# Altium PCB eFuse_proto1.PcbDoc
Units mm, origin at the board's own origin, x right, y up, seen from the top; angles counter-clockwise.
Board outline 91.4 x 57.4 mm, 2 copper layers (Top Layer, Bottom Layer), stack 1.586 mm thick; 75 components, 50 nets, 198 pads, 83 vias.
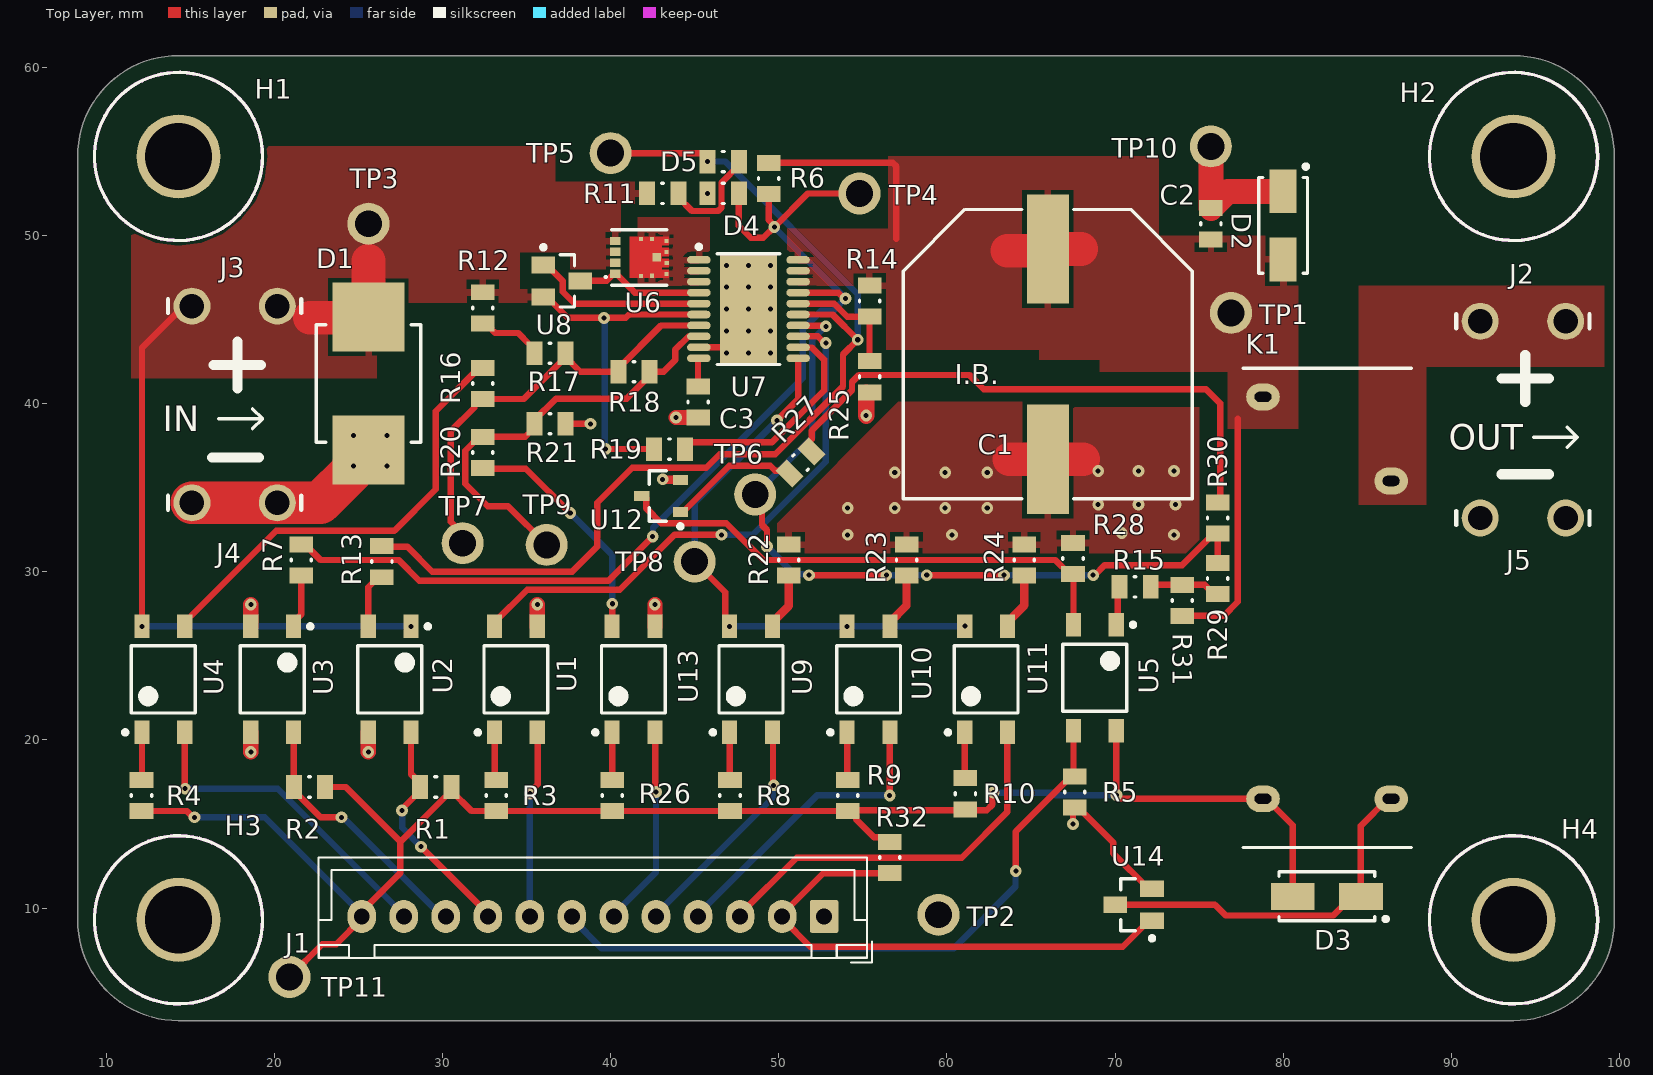
[diagram p0: Top Layer view]
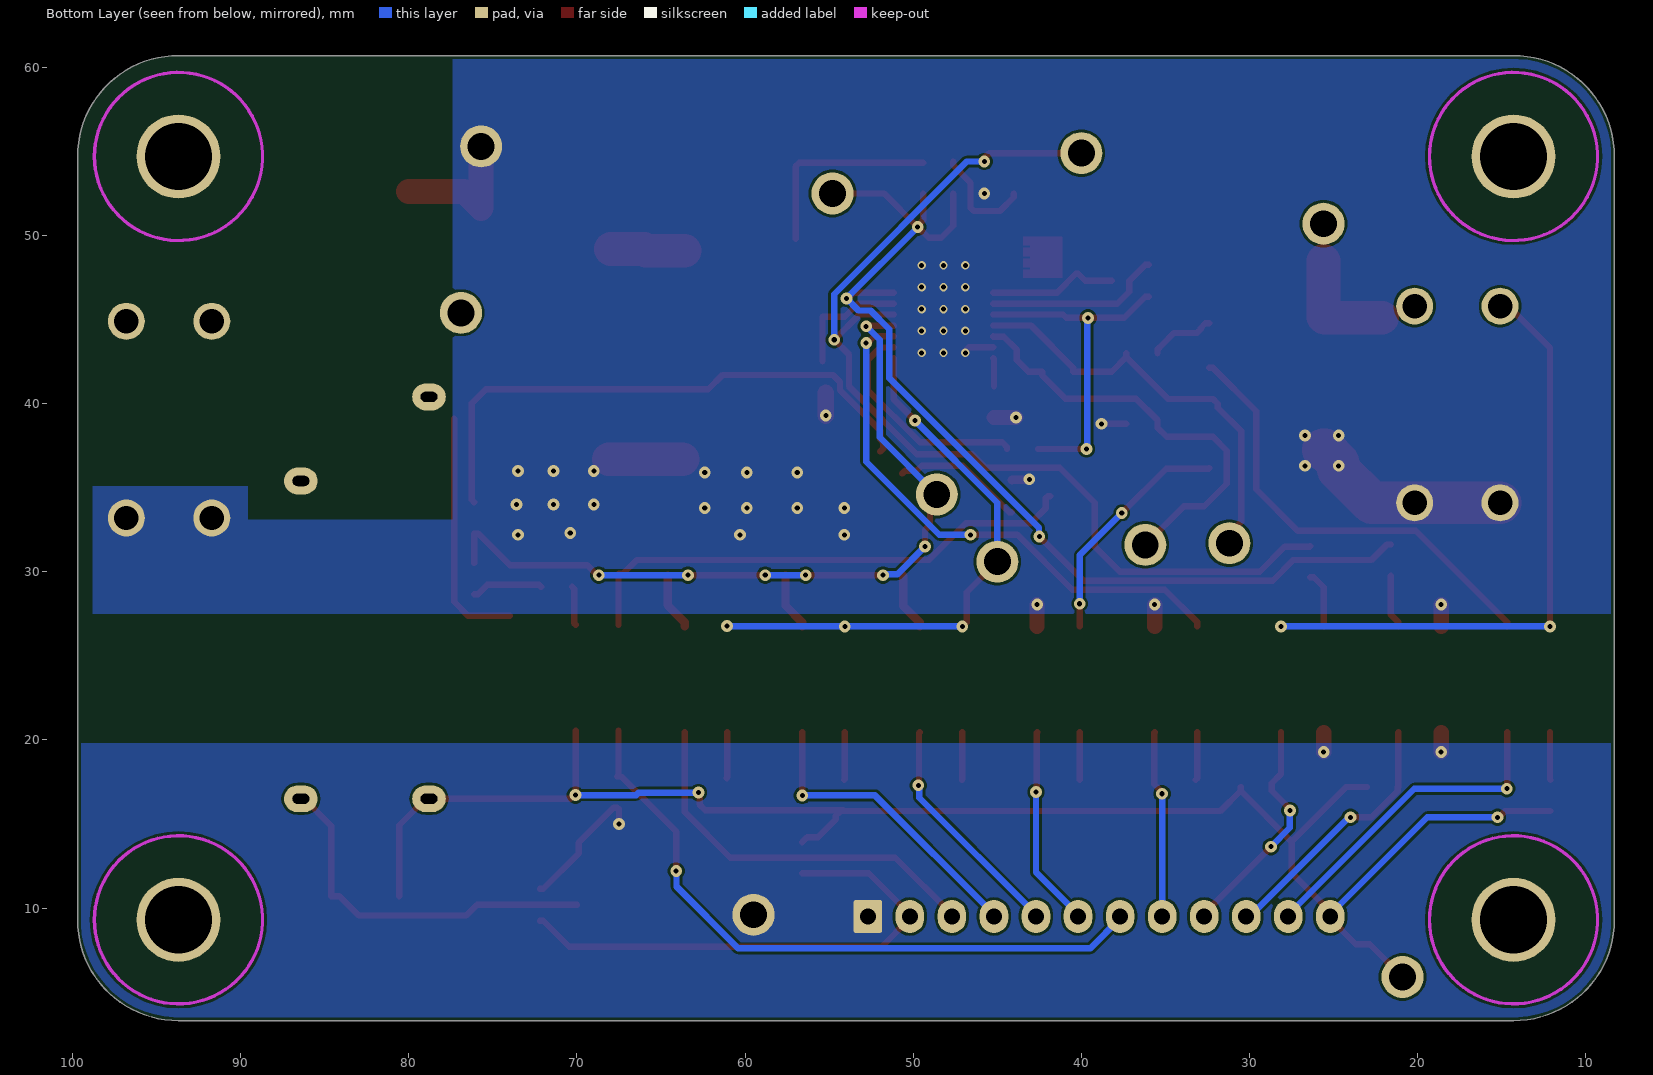
[diagram p1: Bottom Layer view, seen from below]
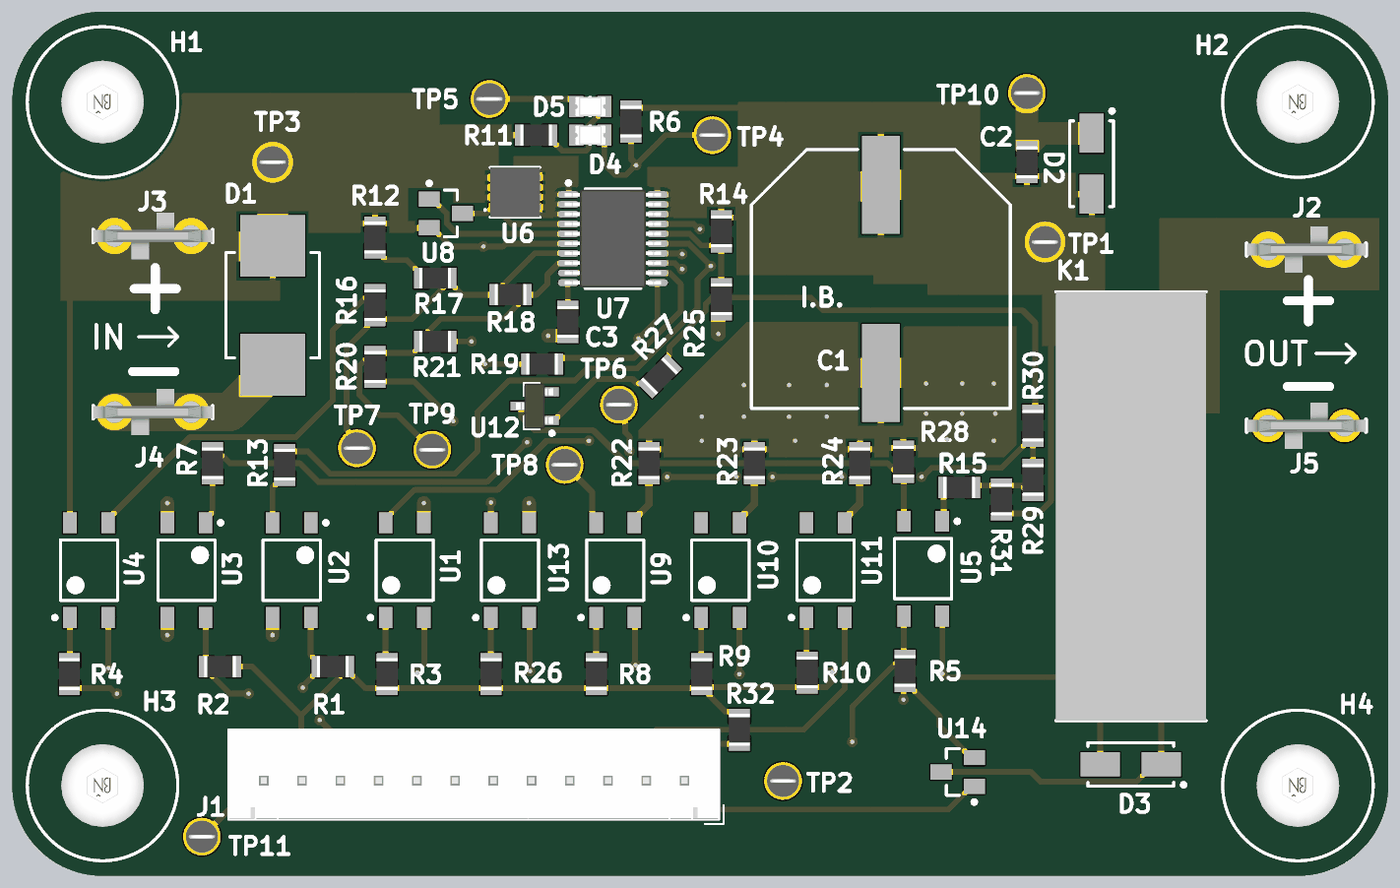
[diagram p2: 3D render of the assembled board from above, using the file's embedded part models]

## Layer stack, top to bottom
Top Solder: solder mask 0.0102, Solder Resist, Dk 3.5
Top Layer: signal copper 0.018
Dielectric 1: dielectric 1.55, FR-4, Dk 4.8
Bottom Layer: signal copper 0.018
Bottom Solder: solder mask 0.0102, Solder Resist, Dk 3.5

## Board outline
8.3,9.3 8.3,54.7 cw(c14.3,54.7) 14.3,60.7 93.7,60.7 cw(c93.7,54.7) 99.7,54.7 99.7,9.3 cw(c93.7,9.3) 93.7,3.3 14.3,3.3 cw(c14.3,9.3)

## Design rules (kind name [scope] priority, off if disabled: settings)
BoardOutlineClearance [All] p1: gap=0.2 ignorepadtopadclearanceinfootprint=FALSE
Clearance [All] p1: gap=0.152 ignorepadtopadclearanceinfootprint=FALSE
DiffPairsRouting [All] p1: maxlimit=1 minlimit=0.152 mostfreqgap=0.254 toplayer_minwidth=0.152 toplayer_maxwidth=1 toplayer_prefwidth=0.381 bottomlayer_minwidth=0.152 bottomlayer_maxwidth=1 bottomlayer_prefwidth=0.381 maxuncoupledlength=12.7
HoleSize [All] p1: absolutevalues=TRUE maxlimit=7 minlimit=0.152 maxpercent=80.000 minpercent=20.000
MatchedLengths [InDifferentialPair('No Differential Pair')] p1: tolerance=0.2 checknetsindiffpair=FALSE checkdiffpairvsdiffpair=TRUE checkxsignals=TRUE checkothers=TRUE usedelayunits=TRUE delaytolerance=0.200000
MinimumSolderMaskSliver [All] p1: minsoldermaskwidth=0.025
PlaneConnect [All] p1: planeconnectstyle=Direct reliefexpansion=0.508 reliefentries=4 reliefconductorwidth=0.254 reliefairgap=0.254
PolygonConnect [All] p1: thpad.connectstyle=Direct thpad.reliefconductorwidth=0.254 thpad.reliefentries=4 thpad.polygonreliefangle="90 Angle" thpad.airgapwidth=0.254 smdpad.connectstyle=Relief smdpad.reliefconductorwidth=0.4 smdpad.reliefentries=4 smdpad.polygonreliefangle="90 Angle" smdpad.airgapwidth=0.254 via.connectstyle=Direct via.reliefconductorwidth=0.254 via.reliefentries=4 via.polygonreliefangle="90 Angle" via.airgapwidth=0.254
RoutingVias [All] p1: holewidth=0.4 width=1 viastyle="Through Hole" minholewidth=0.3 minwidth=0.5 maxholewidth=10 maxwidth=15 useviatemplates=TRUE viatemplateguid#1={22DDA1EE-3D9E-43C3-AB2D-8542CEF153AB} viatemplatename#1=30x70
SilkToSilkClearance [All] p1: silktosilkclearance=0.152
SilkToSolderMaskClearance [IsPad] p1: minsilkscreentomaskgap=0.025 clearancetoexposedcopper=TRUE
SolderMaskExpansion [All] p1: expansion=0.102 istentingtop=FALSE
Width [All] p1: maxlimit=2.54 minlimit=0.152 preferedwidth=0.381 minimp=50.000000 maximp=50.000000 favimp=50.000000
24 further rules are at their usual default settings.

## Classes and differential pairs
component class eFuse: C1 C2 C3 D1 D2 D3 H1 H2 H3 H4 J2 J3 J4 J5 K1 R12 R14 R16 R17 R18 R19 R20 R21 R25 TP1 TP3 TP7 TP8 TP9 TP10 U6 U7 U8
component class Signal: D4 D5 J1 R1 R2 R3 R4 R5 R6 R7 R8 R9 R10 R11 R13 R15 R22 R23 R24 R26 R27 R28 R29 R30 R31 R32 TP2 TP4 TP5 TP6 TP11 U1 U2 U3 U4 U5 U9 U10 U11 U12 U13 U14

## Components (designator, comment, footprint, x,y, rotation, side; value= is the part's Value field where it differs from the comment)
C1 "470uF" CAP_16MM_SMD 66,42.95 r270 top
C2 "1uF" 0805 75.7,50.7 r270 top
C3 "x" 0805 45.2,40.1 r270 top
D1 "SMCJ58CA-HF" "DO-214AB-SMC Bipolar" 25.6,41.2 r90 top
D2 "SS210ATR" "DO-214AC, SMA" 80,50.6 r270 top
D3 "SS210ATR" "DO-214AC, SMA" 82.6,10.7 r180 top
D4 "Green" "0805 LED" 46.7,52.5 r180 top
D5 "Red" "0805 LED" 46.7,54.4 r180 top
H1 "mounting hole" "M3 HOLE iso" 14.3,54.7 r0 top
H2 "mounting hole" "M3 HOLE iso" 93.7,54.7 r0 top
H3 "mounting hole" "M3 HOLE iso" 14.3,9.3 r0 top
H4 "mounting hole" "M3 HOLE iso" 93.7,9.3 r0 top
J1 "xh_12_vert" JST_XH_B12B-XH-A_1x12_P2.50mm_Vertical 52.7,9.5 r180 top
J2 "Blade Quick Disconnect" "TE blade connector" 91.72,44.9 r0 top
J3 "Blade Quick Disconnect" "TE blade connector" 20.18,45.8 r180 top
J4 "Blade Quick Disconnect" "TE blade connector" 20.18,34.1 r180 top
J5 "Blade Quick Disconnect" "TE blade connector" 91.72,33.2 r0 top
K1 "G6RL-1A DC3" "G6RL-1A DC3 relay" 77.61,42.1 r90 top
R1 "10k" 0805 29.6,17.2 r180 top
R2 "10k" 0805 22.1,17.2 r180 top
R3 "390" 0805 33.2,16.7 r270 top
R4 "390" 0805 12.1,16.7 r270 top
R5 "x" 0805 67.6,16.9 r270 top
R6 "2k" 0805 49.4,53.4 r90 top
R7 "4.3k" 0805 21.6,30.7 r270 top
R8 "390" 0805 47.1,16.7 r270 top
R9 "390" 0805 54.1,16.7 r270 top
R10 "390" 0805 61.1,16.8 r270 top
R11 "2k" 0805 43.1,52.5 r180 top
R12 "910K" 0805 32.4,45.7 r90 top
R13 "4.3k" 0805 26.4,30.6 r270 top
R14 "1M" 0805 55.4,46.1 r90 top
R15 ">620" 0805 71.2,29.1 r180 top
R16 "430k" 0805 32.4,41.2 r90 top
R17 "75k" 0805 36.4,43 r180 top
R18 "24k" 0805 41.4,41.9 r180 top
R19 "10k" 0805 43.5,37.3 r0 top
R20 "51k" 0805 32.4,37.1 r90 top
R21 "91k" 0805 36.4,38.8 r180 top
R22 "13K" 0805 50.6,30.7 r270 top
R23 "6.8k" 0805 57.6,30.7 r270 top
R24 "4.3k" 0805 64.6,30.7 r270 top
R25 "56k" 0805 55.4,41.6 r90 top
R26 "390" 0805 40.1,16.7 r270 top
R27 "1K" 0805 51.3,36.5 r45 top
R28 "0" 0805 67.5,30.8 r90 top
R29 "0" 0805 76.1,29.6 r270 top
R30 "0" 0805 76.1,33.2 r270 top
R31 "0" 0805 74,28.3 r270 top
R32 "10k" 0805 56.6,13 r90 top
TP1 "Vout" "Test Loop 1.6mm" 76.9,45.4 r0 top
TP2 "DGND" "Test Loop 1.6mm" 59.5,9.6 r0 top
TP3 "Vin" "Test Loop 1.6mm" 25.6,50.7 r0 top
TP4 "PGOOD" "Test Loop 1.6mm" 54.8,52.5 r0 top
TP5 "FLT" "Test Loop 1.6mm" 40,54.9 r0 top
TP6 "IMON" "Test Loop 1.6mm" 48.6,34.6 r0 top
TP7 "UVLO" "Test Loop 1.6mm" 31.2,31.7 r0 top
TP8 "ILIM" "Test Loop 1.6mm" 45,30.6 r0 top
TP9 "OVP" "Test Loop 1.6mm" 36.2,31.6 r0 top
TP10 "PGND" "Test Loop 1.6mm" 75.7,55.3 r0 top
TP11 "+3.3V" "Test Loop 1.6mm" 20.9,5.9 r0 top
U1 "WL-OCPT" 4-SOP_WE_opto-isolator 34.37,23.6 r90 top
U2 "WL-OCPT" 4-SOP_WE_opto-isolator 26.86,23.6 r270 top
U3 "WL-OCPT" 4-SOP_WE_opto-isolator 19.87,23.6 r270 top
U4 "WL-OCPT" 4-SOP_WE_opto-isolator 13.4,23.6 r90 top
U5 "WL-OCPT" 4-SOP_WE_opto-isolator 68.8,23.7 r270 top
U6 "‎CSD19537Q3‎" "8-VSON (3,3x3,3)" 41.8,48.7 r270 top
U7 "TPS26631PWPT" TSSOP_P065S6.6x6.6 48.2,45.625 r0 top
U8 "BSS138‎" SOT-23-3 37.1,47.3 r0 top
U9 "WL-OCPT" 4-SOP_WE_opto-isolator 48.35,23.6 r90 top
U10 "WL-OCPT" 4-SOP_WE_opto-isolator 55.34,23.6 r90 top
U11 "WL-OCPT" 4-SOP_WE_opto-isolator 62.33,23.6 r90 top
U12 "NPN" SOT23(TO-236AB)P095S230x290 43,34.5 r180 top
U13 "WL-OCPT" 4-SOP_WE_opto-isolator 41.36,23.6 r90 top
U14 "BSS138‎" SOT-23-3 71.1,10.2 r180 top

## Footprints (in the part's own frame and the unit in brackets; to place one, negate y for a bottom-side part, rotate by r counter-clockwise, add the part's x,y. Pads: shape width x height; smd on the part's side, far side on the other; paste and mask are expansions set on the pad)
4-SOP_WE_opto-isolator [mm] "Würth Elektronik Optocoupler Phototransistor foorptint"
  rect 1.4x0.9 smd: 1(-3.15,1.27) 2(-3.15,-1.27) 3(3.15,-1.27) 4(3.15,1.27)
  silkscreen extent -3.27,-1.9 2,2.39, body extent -2.3,-1.9 2.3,1.9, height 2.1
"8-VSON (3,3x3,3)" [mm]
  rect 0.5x0.63 smd paste-10 mask+0.08: 1(0.983,-1.534) 2(-0.976,-1.534) 2(-0.323,-1.534) 2(0.33,-1.534)
  rect 0.25x0.25 smd paste-10 mask+0: 3(-1.1,0) 3(-1.096,0.667) 3(-0.979,1.533) 3(-0.325,1.525) 3(0.329,1.534) 3(0.983,1.526) 3(1.088,0.667) 3(1.1,0)
  rect 0.5x0.5 smd paste-10 mask+0: 3(-0.008,0.952)
  Top Layer region: -1.226,-0.044 -1.226,-0.659 1.224,-0.659 1.224,1.661 0.728,1.661 0.728,1.241 0.573,1.241 0.573,1.661 0.075,1.661 0.075,1.241 -0.078,1.241 -0.078,1.661 -0.574,1.661 -0.574,1.241 -0.729,1.241 -0.729,1.661 -1.226,1.661
  silkscreen extent -1.65,-2.11 1.65,1.55, body extent -1.65,-1.75 1.65,1.55, height 1.1
0805 [mm] "Chip Resistor, 2-Leads, Body 2.00x1.25mm, IPC Medium Density"
  rect 0.95x1.4 smd: 1(-0.925,0) 2(0.925,0)
  silkscreen extent -0.05,-0.6 0.05,0.6, body extent -1.05,-0.7 1.05,0.7, height 0.6
"0805 LED" [mm] "Chip Resistor, 2-Leads, Body 2.00x1.25mm, IPC Medium Density"
  rect 0.95x1.4 smd: 1(-0.925,0) 2(0.925,0)
  silkscreen extent -0.05,-0.6 0.05,0.6, body extent -1,-0.62 1,0.62, height 0.8
CAP_16MM_SMD [mm] "Aluminum Electrolytic Capacitor, Body 17.00x17.00x16.80mm, IPC Low Density"
  rect 6.5x2.5 smd: 1(-6.25,0) 2(6.25,0)
  silkscreen extent -8.6,-8.6 8.6,8.6, body extent -8.6,-8.6 8.6,8.6, height 16.8
"DO-214AB-SMC Bipolar" [mm] "Molded Diode, 2-Leads, Body 6.75x5.90mm, IPC Medium Density"
  rect 4.1x4.3 smd: 1(-3.95,0) 2(3.95,0)
  silkscreen extent -3.5,-3.1 3.5,3.1, body extent -3.5,-3.1 3.5,3.1, height 2.39
"DO-214AC, SMA" [mm] "Molded Diode, 2-Leads, Body 5.23x2.62mm, IPC Medium Density"
  rect 2.6x1.6 smd: 1(-2.025,0) 2(2.025,0)
  silkscreen extent -3.62,-1.45 2.85,1.48, body extent -2.83,-1.42 2.83,1.42, height 2.95
"G6RL-1A DC3 relay" [mm]
  oval 1.6x2 hole 0.6 slot 1 at 90 deg paste-6: 1(-25.6,-1.19) 2(-1.7,-1.19) 3(-6.7,-8.81) 5(-25.6,-8.81)
  silkscreen extent -28.5,-10 0,0, body extent -28.5,-10 0,0, height 12.3
JST_XH_B12B-XH-A_1x12_P2.50mm_Vertical [mm]
  rrect15% 1.7x1.95 hole 0.95: 1(0,0)
  rrect100% 1.7x1.95 hole 0.95: 2(2.5,0) 3(5,0) 4(7.5,0) 5(10,0) 6(12.5,0) 7(15,0) 8(17.5,0) 9(20,0) 10(22.5,0) 11(25,0) 12(27.5,0)
  silkscreen extent -2.85,-3.51 30.06,2.75, body extent -2.59,-3.48 30.02,2.36, height 7.21
"M3 HOLE iso" [mm]
  round 5 hole 4 paste-6: 1(0,0)
  Keep-Out Layer circle w0.2: c0,0 r5
  silkscreen extent -5,-5 5,5, body extent -3.18,-2.75 3.18,2.75, height 1.5
SOT23(TO-236AB)P095S230x290 [mm] "SOT23, 3-Leads, Body 2.90x2.30mm, Pitch 0.95mm, IPC Medium Density"
  rect 0.9x0.6 smd: 1(-1.15,0.95) 2(-1.15,-0.95) 3(1.15,0)
  silkscreen extent -1.28,-1.5 0.7,1.92, body extent -1.25,-1.5 1.25,1.5, height 1.1
SOT-23-3 [mm] "SOT23, 3-Leads, Body 2.92x2.40mm, Pitch 0.95mm, IPC Medium Density"
  rect 1.4x1 smd: 1(-1.1,0.95) 2(-1.1,-0.95) 3(1.1,0)
  silkscreen extent -1.22,-1.55 0.75,2.12, body extent -0.75,-1.56 0.75,1.56, height 1.2
"TE blade connector" [mm] "Quick Disconnect Connectors CONN QC TAB 0.250 SOLDER"
  round 2.2 hole 1.45: 1(0,0) 1(5.08,0)
  silkscreen extent -1.42,-0.42 6.5,0.42, body extent -1.42,-1.54 6.5,1.54, height 10.26
"Test Loop 1.6mm" [mm]
  round 2.5 hole 1.6 paste-6: 1(0,0)
  body extent -1.07,-1.07 1.06,1.07, height 4.57
TSSOP_P065S6.6x6.6 [mm]
  oval 1.4x0.45 smd mask+0.05: 1(-2.95,2.925) 2(-2.95,2.275) 3(-2.95,1.625) 4(-2.95,0.975) 5(-2.95,0.325) 6(-2.95,-0.325) 7(-2.95,-0.975) 8(-2.95,-1.625) 9(-2.95,-2.275) 10(-2.95,-2.925) 11(2.95,-2.925) 12(2.95,-2.275) 13(2.95,-1.625) 14(2.95,-0.975) 15(2.95,-0.325) 16(2.95,0.325) 17(2.95,0.975) 18(2.95,1.625) 19(2.95,2.275) 20(2.95,2.925)
  rect 3.4x6.5 smd paste-6.5 mask-6.5: PAD(0,0)
  silkscreen extent -3.07,-3.3 1.85,3.82, body extent -3.2,-3.25 3.2,3.25, height 1.13

## Part data
C1: library part "cap pol"
C2 C3: library part cap
D1: library part "TVS Diode"
D2 D3: library part "shotkey diode"
D4 D5: library part LED
K1: library part Relay
R1 R2 R3 R4 R5 R6 R7 R8 R9 R10 R11 R12 R13 R14 R15 R16 R17 R18 R19 R20 R21 R22 R23 R24 R25 R26 R27 R28 R29 R30 R31 R32: library part res0805
TP1 TP2 TP3 TP4 TP5 TP6 TP7 TP8 TP9 TP10 TP11: library part "Test point"
U1 U2 U3 U4 U5 U9 U10 U11 U13: library part "optoc WE"
U6 U8 U14: library part "N-mosfet en"

## Via types
v1: diameter 0.7, hole 0.3, Top Layer to Bottom Layer, 68 vias
v2: diameter 0.5, hole 0.3, Top Layer to Bottom Layer, 15 vias

## Nets (pads, with @x,y where several pads share a name; then routed paths per layer and width w, separated by ;. In a path a pad name is that pad's centre, name@x,y a point inside that pad or via, vN(x,y) a via of type N, cw(c..) or ccw(c..) an arc to the next point about the centre after c; other vN are vias at no path point)
+3.3V: D3.2 J1.12 K1.1 R1.1 R2.1 R3.2 R4.2 R8.2 R9.2 R10.2 R26.2 R32.2 TP11.1 U5.4 | length 100.8
  Top Layer w0.381: R4.2 14.793,15.775 15.168,15.4 v1(15.255,15.4) ; TP11.1 22.857,7.857 23.682,7.857 J1.12@25.2,9.375 ; R2.1 24.25,17.2 27.5,13.95 ; J1.12 25.2,9.8 27.5,12.1 27.5,13.95 ; R1.1 R1.1@30.525,16.975 ; R9.2@54.15,15.825 61.1,15.825 62.372,15.825 62.708,16.162 62.708,16.808 v1(62.769,16.869) ; R32.2 56.316,14.209 55.666,14.209 54.61,15.265 54.61,15.49 54.325,15.775 53.875,15.775 R8.2 R26.2 R3.2 31.725,15.775 R1.1@30.525,16.975 ; U5.4 70.082,20.538 70.082,16.734 v1(70.094,16.722) 70.181,16.722 70.402,16.5 K1.1 79,16.5 80.575,14.925 D3.2 ; 27.5,13.95 R1.1@30.525,16.975
  Bottom Layer w0.381: v1(15.255,15.4) 19.425,15.4 25.2,9.625 J1.12 ; v1(62.769,16.869) 66.327,16.869 66.475,16.722 v1(70.094,16.722)
DGND: J1.1 R5.2 TP2.1 U2.3 U3.3 U14.2 | length 10.5
  Top Layer w0.381: U3.3@18.725,20.3 U3.3@18.725,20.45 ; v1(67.5,15) 67.5,15.875 R5.2 67.825,15.975 69.9,13.9 69.9,13.25 72,11.15 U14.2
  Top Layer w0.9: v1(18.6,19.289) U3.3 ; v1(25.59,19.289) U2.3
NetC3_1: C3.1 U7.10 | length 1.7
  Top Layer w0.381: C3.1 45.2,42.668 45.232,42.7 U7.10
NetD3_1: D3.1 K1.5 U14.3 | length 22
  Top Layer w0.381: U14.3 75.942,10.2 76.585,9.557 82.982,9.557 84.125,10.7 D3.1 84.625,14.905 86.22,16.5 K1.5
NetD4_1: D4.1 R6.1 R7.1 TP4.1 U7.17 | length 63.8
  Top Layer w0.381: R7.1 21.825,31.625 22.75,30.7 27.4,30.7 28.626,29.474 39.874,29.474 v1(42.5,32.1) ; D4.1 47.625,50.575 48.342,49.858 49.073,49.858 49.715,50.5 v1(49.734,50.5) ; R6.1 49.4,50.921 49.734,50.586 v1(49.734,50.5) ; U7.17 53.548,46.6 53.888,46.26 v1(53.974,46.26) ; TP4.1 51.734,52.5 v1(49.734,50.5)
  Bottom Layer w0.381: v1(42.5,32.1) 42.521,32.121 42.521,32.621 51.421,41.521 51.421,44.421 52.54,45.54 53.254,45.54 v1(53.974,46.26) v1(49.734,50.5)
NetD5_1: D5.1 R11.1 | length 6.4
  Top Layer w0.381: R11.1 44.025,52.275 44.843,51.457 46.392,51.457 46.593,51.658 46.593,53.143 47.625,54.175 D5.1
NetD5_2: D5.2 R13.1 TP5.1 U7.15 | length 62.5
  Top Layer w0.381: R13.1 26.425,31.5 27.9,31.5 29.393,30.007 37.707,30.007 39.2,31.5 39.2,34.1 41.293,36.193 45.693,36.193 46.5,37 49.8,37 53.824,41.024 53.824,42.924 v1(54.7,43.8) 53.2,45.3 U7.15 ; TP5.1 45.491,54.9 45.775,54.615 v1(45.775,54.4)
  Bottom Layer w0.381: v1(45.775,54.4) 46.814,54.4 54.7,46.514 v1(54.7,43.8)
NetJ1_2: J1.2 R32.1 U14.1 | length 31
  Top Layer w0.381: R32.1 52.65,12.075 50.2,9.625 J1.2 50.2,9.375 51.875,7.7 70.45,7.7 72,9.25 U14.1
NetJ1_3: J1.3 U11.2 | length 23.2
  Top Layer w0.381: J1.3@47.7,9.625 51.075,13 60.88,13 63.6,15.72 63.6,18.653 U11.2
NetJ1_4: J1.4 U10.2 | length 18.1
  Top Layer w0.381: v1(56.6,16.7) 56.605,16.705 56.605,20.445 U10.2
  Bottom Layer w0.381: J1.4@45.2,9.625 52.275,16.7 v1(56.6,16.7)
NetJ1_5: J1.5 U9.2 | length 13.8
  Top Layer w0.381: U9.2 49.66,20.41 49.66,17.34 v1(49.7,17.3)
  Bottom Layer w0.381: J1.5@42.7,9.625 49.639,16.564 49.639,17.239 v1(49.7,17.3)
NetJ1_6: J1.6 U13.2 | length 11.9
  Top Layer w0.381: U13.2 42.665,20.415 42.665,16.935 v1(42.7,16.9)
  Bottom Layer w0.381: J1.6@40.2,9.625 42.7,12.125 v1(42.7,16.9)
NetJ1_7: J1.7 R5.1 U5.3 | length 39.7
  Top Layer w0.381: v1(64.1,12.2) 64.1,14.55 67.375,17.825 R5.1 67.53,17.895 U5.3
  Bottom Layer w0.381: J1.7 37.7,9.375 39.475,7.6 60.4,7.6 64.079,11.278 64.079,12.179 v1(64.1,12.2)
NetJ1_8: J1.8 U1.2 | length 11.2
  Top Layer w0.381: v1(35.2,16.8) 35.2,16.886 35.67,17.356 35.67,20.42 U1.2
  Bottom Layer w0.381: J1.8 v1(35.2,16.8)
NetJ1_9: J1.9 R1.2 U2.4 | length 13.7
  Top Layer w0.381: v1(27.6,15.8) 27.661,15.861 27.661,15.961 28.675,16.975 R1.2 28.675,17.425 28.13,17.97 U2.4 ; v1(28.723,13.651) 32.7,9.674 J1.9
  Bottom Layer w0.381: v1(27.6,15.8) 27.6,14.774 v1(28.723,13.651)
NetJ1_10: J1.10 R2.2 U3.4 | length 15.6
  Top Layer w0.381: U3.4 21.158,20.432 21.158,17.218 R2.2 21.175,16.975 22.75,15.4 v1(24,15.4)
  Bottom Layer w0.381: v1(24,15.4) 24.086,15.4 29.986,9.5 J1.10
NetJ1_11: J1.11 U4.2 | length 19.6
  Top Layer w0.381: U4.2 14.685,20.435 14.685,17.115 v1(14.7,17.1)
  Bottom Layer w0.381: v1(14.7,17.1) 20.2,17.1 27.7,9.6 J1.11
NetJ2_1: J2.1 K1.3
NetR3_1: R3.1 U1.1 | length 2.9
  Top Layer w0.381: U1.1 33.1,17.725 R3.1
NetR4_1: R4.1 U4.1 | length 2.8
  Top Layer w0.381: R4.1 12.13,17.655 U4.1
NetR7_2: R7.2 U3.1 | length 3.2
  Top Layer w0.381: U3.1 21.14,27 21.6,27.46 R7.2
NetR8_1: R8.1 U9.1 | length 2.8
  Top Layer w0.381: U9.1 47.08,17.645 R8.1
NetR9_1: R9.1 U10.1 | length 2.8
  Top Layer w0.381: U10.1 54.07,17.655 R9.1
NetR10_1: R10.1 U11.1 | length 2.7
  Top Layer w0.381: U11.1 61.06,17.765 R10.1
NetR12_1: R12.1 R17.2 | length 4
  Top Layer w0.381: R12.1 32.625,44.775 32.91,44.491 32.91,44.423 33.133,44.2 34.5,44.2 35.191,43.51 35.475,43.225 R17.2
NetR13_2: R13.2 U2.2 | length 3.4
  Top Layer w0.381: U2.2 25.59,29.09 26.175,29.675 R13.2
NetR14_1: R14.1 R25.2 U7.16 | length 7.2
  Top Layer w0.381: U7.16 53.304,45.95 54.079,45.175 R14.1 R25.2
NetR15_1: R15.1 R29.2 R31.1 | length 4.3
  Top Layer w0.381: R15.1 72.25,29.225 R31.1 75.325,29.225 75.875,28.675 R29.2
NetR15_2: R15.2 U5.1 | length 2.3
  Top Layer w0.381: U5.1 70.172,26.953 70.172,28.997 R15.2
NetR16_1: R16.1 R17.1 R18.2 TP7.1 U7.7 | length 25.5
  Top Layer w0.381: TP7.1 31.2,32.273 30.5,32.973 30.5,38.375 31.891,39.766 31.891,39.991 32.175,40.275 R16.1 34.825,40.275 R17.1@37.325,42.775 ; R17.1 R17.1@37.325,42.775 ; U7.7 43,44.65 40.475,42.125 R18.2 38.2,41.9 R17.1@37.325,42.775
NetR16_2: R16.2 U4.3 | length 27
  Top Layer w0.381: U4.3 14.67,27 20.113,32.443 27.143,32.443 29.6,34.9 29.6,39.55 32.175,42.125 R16.2
NetR18_1: R18.1 R20.2 R21.2 TP9.1 U7.8 | length 25.8
  Top Layer w0.381: TP9.1 33.9,33.9 32.7,33.9 31.357,35.243 31.357,37.207 32.175,38.025 R20.2 34.925,38.025 35.475,38.575 R21.2 35.475,39.025 36.75,40.3 40.95,40.3 42.325,41.675 R18.1 43.15,41.9 43.845,42.595 43.845,43.223 44.609,43.987 45.237,43.987 U7.8
NetR19_2: R19.2 U7.12 | length 13.5
  Top Layer w0.381: R19.2 44.425,37.416 44.71,37.7 49.6,37.7 52.7,40.8 52.7,42.6 51.963,43.337 51.163,43.337 U7.12
NetR20_1: R20.1 U13.4 | length 14.1
  Top Layer w0.381: R20.1 32.438,36.138 34.962,36.138 v1(37.6,33.5) ; U13.4 40.095,26.755 40.095,28.095 v1(40.1,28.1)
  Bottom Layer w0.381: v1(37.6,33.5) 40.1,31 v1(40.1,28.1)
NetR22_2: R22.2 U9.3 | length 3.4
  Top Layer w0.5: U9.3 49.62,27 50.6,27.98 R22.2
NetR23_2: R23.2 U10.3 | length 3.4
  Top Layer w0.5: U10.3 56.61,27 57.6,27.99 R23.2
NetR24_2: R24.2 U11.3 | length 3.4
  Top Layer w0.5: U11.3 63.6,27 64.6,28 R24.2
NetR26_1: R26.1 U13.1 | length 2.8
  Top Layer w0.381: U13.1 40.09,17.635 R26.1
NetR27_1: R27.1 U12.1 | length 7.8
  Top Layer w0.381: U12.1 44.3,33.55 47.05,36.3 49.5,36.3 49.795,36.005 50.487,36.005 R27.1
NetR27_2: R27.2 R30.1 | length 34
  Top Layer w0.381: R27.2 51.795,37.313 51.795,37.716 51.954,37.875 51.954,38.4 54.357,40.803 54.357,41.292 54.771,41.706 61.341,41.706 62.188,40.86 75.413,40.86 76.259,40.013 76.259,34.284 R30.1
NetR28_1: R28.1 U5.2 U12.3 | length 31
  Top Layer w0.381: U12.3 42,34.5 42.11,34.391 42.11,33.79 43.007,32.893 46.887,32.893 49.08,30.7 66.45,30.7 67.275,29.875 R28.1 67.53,29.845 U5.2
NetR29_1: R29.1 R30.2 TP6.1 U7.14 | length 47.1
  Top Layer w0.381: TP6.1 49.005,34.195 49.005,32.782 49.3,32.487 v1(49.3,31.5) ; U7.14 51.163,44.637 52.763,44.637 v1(52.8,44.6) ; v1(51.802,29.8) v1(56.398,29.8) ; v1(58.802,29.8) v1(63.398,29.8) ; v1(68.702,29.8) 68.789,29.8 69.389,30.4 74,30.4 74.895,31.295 75.875,32.275 R30.2 R29.1
  Bottom Layer w0.381: TP6.1 52,38 52,43.8 v1(52.8,44.6) ; v1(49.3,31.5) 50.939,29.861 51.741,29.861 v1(51.802,29.8) ; v1(56.398,29.8) v1(58.802,29.8) ; v1(63.398,29.8) v1(68.702,29.8)
NetTP8_1: TP8.1 U7.11 U9.4 U10.4 U11.4 | length 33.4
  Top Layer w0.381: TP8.1 46.82,28.78 46.82,27.01 v1(47.08,26.75) ; v1(49.9,39) 51.15,40.25 U7.11
  Bottom Layer w0.381: TP8.1 45,34.1 v1(49.9,39) ; v1(47.08,26.75) v1(54.07,26.75) 54.086,26.766 61.058,26.766 v1(61.074,26.783)
NetU1_4: U1.4 U7.13 | length 32.8
  Top Layer w0.381: U1.4 33.1,27 35.04,28.94 40.54,28.94 43.8,32.2 v1(46.6,32.2) ; U7.13 52.314,44 52.714,43.6 v1(52.8,43.6)
  Bottom Layer w0.381: v1(46.6,32.2) 48.453,32.2 52.8,36.547 v1(52.8,43.6)
NetU6_1: U6.1 U7.4 U8.3 | length 7.7
  Top Layer w0.381: U8.3 39.767,47.3 40.188,47.721 U6.1@40.253,47.721 ; U6.1 40.331,47.717 41.448,46.6 U7.4
NetU6_3: U6.3 U7.1 U7.2 U7.3
NetU7_5: U7.5 U8.1 | length 10.6
  Top Layer w0.381: U8.1 36.2,48.25 37.157,47.293 37.157,46.658 37.865,45.95 U7.5
PGND: C1.2 C2.1 C3.2 D1.1 D2.1 D4.2 J4.1 J5.1 R21.1 R22.1 R23.1 R24.1 R25.1 R28.2 TP10.1 U1.3 U3.2 U7.9 U7.PAD U12.2 U13.3 | length 35.8
  Top Layer w0.381: R21.1 v1(38.8,38.8) ; U7.9 46.691,43.35 46.9,43.141 v2(46.9,43.025)
  Top Layer w0.5: v1(43.1,35.5) 43.125,35.475 44.125,35.475 U12.2
  Top Layer w0.9: U3.2 v1(18.6,28.061) ; U1.3 v1(35.64,28.061) ; U13.3 v1(42.63,28.061) ; v1(43.889,39.175) C3.2
  Top Layer w1: v1(55.2,39.3) R25.1@55.2,40.65
  Top Layer w1.5: TP10.1 C2.1 76.7,52.625 D2.1
  Top Layer w2: 63.7,36.7 C1.2 68.1,36.7
  Top Layer w2.54: J4.1@15.1,34.1 20.18,34.1 22.732,34.1 24.72,36.088 24.72,36.47 25.5,37.25 D1.1
  other v1: 54.1,32.2 60.3,32.2 73.5,32.2 70.4,32.3 54.1,33.8 56.9,33.8 59.9,33.8 62.4,33.8 69,34 71.4,34 73.6,34 56.9,35.9 59.9,35.9 62.4,35.9 69,36 71.4,36 73.5,36 24.7,36.3 26.7,36.3 24.7,38.1 26.7,38.1 45.775,52.5
  other v2: 48.2,43.025 49.5,43.025 46.9,44.325 48.2,44.325 49.5,44.325 46.9,45.625 48.2,45.625 49.5,45.625 46.9,46.925 48.2,46.925 49.5,46.925 46.9,48.225 48.2,48.225 49.5,48.225
Vin: D1.2 J3.1 R11.2 R12.2 R19.1 TP3.1 U2.1 U4.4 U6.2 U7.6 U8.2 | length 64.2
  Top Layer w0.381: v1(12.13,26.75) 12.13,43.33 J3.1@15.1,46.3 ; U8.2 36.2,46.35 37.45,45.1 v1(39.6,45.1) 40.9,45.1 41.1,45.3 U7.6 ; v1(39.7,37.3) R19.1
  Top Layer w2: 22.1,45.1 25.55,45.1 D1.2 25.6,48.5
  Bottom Layer w0.381: v1(12.13,26.75) v1(28.13,26.75) ; v1(39.6,45.1) 39.65,45.05 39.65,37.35 v1(39.7,37.3)
Vout: C1.1 C2.2 D2.2 K1.2 R6.2 R14.2 R31.2 TP1.1 U7.18 U7.19 U7.20 | length 31
  Top Layer w0.381: R6.2 56.777,54.325 57,54.102 57,49.8 ; R31.2 76.46,27.375 77.3,28.215 77.3,39.1
  Top Layer w2: 63.6,49.1 65.9,49.1 C1.1 68,49.2
pads on no net: H1.1 H2.1 H3.1 H4.1

## Polygon pours and split planes (outlines as drawn)
PGND on Bottom Layer "NONET_L02_P-001" (solid, remove dead copper, pour order 4): 7,52.8 7,61.7 77.4,61.7 77.4,45.7 77.4,33.1 89.582,33.1 89.582,35.1 98.8,35.1 98.8,33.1 98.8,27.5 77.4,27.5 7,27.5
DGND on Bottom Layer "NONET_L02_P-001" (solid, pour order 3): 5.9,19.8 106.2,19.8 106.2,2.8 5.9,2.8
PGND on Top Layer "NONET_L02_P-001" (solid, pour order 6): 67.6,39.8 68.6,39.8 75,39.8 75,31.1 49.9,31.1 49.9,32.9 57.1,40.1 65.381,40.1
Vout on Top Layer "NONET_L02_P-001" (solid, pour order 5): 50.5,47 56.4,47 56.4,43.2 65.5,43.2 65.5,42.6 69.1,42.6 69.1,41.9 76.7,41.9 76.7,38.495 80.9,38.495 80.9,50 72.6,50 72.6,54.7 56.51,54.7 56.51,50.4 50.5,50.4
Vin on Top Layer "Vin_plane" (solid, remove dead copper, pour order 0): 40.6,48 40.6,51.9 42.177,51.9 42.172,53.2 36.7,53.2 36.7,55.3 17.3,55.3 17.3,50.7 11.5,50.7 11.5,41.5 26.1,41.5 26.1,46 36.5,46 36.5,46.8 34.6,46.8 34.6,49 37.6,49 37.6,48
NetU6_3 on Top Layer "NONET_L02_P-001" (solid, pour order 2): 45.9,47 41.6,47 41.6,51.1 45.9,51.1
NetJ2_1 on Top Layer "NONET_L02_P-001" (solid, pour order 7): 88.5,34 84.5,34 84.5,47 99.1,47 99.1,42.2 88.5,42.2

## Silkscreen, mask and mechanical layers (free items; w line width, h text height)
Top Overlay:
  circle w0.2: c14.3,9.3 r5
  circle w0.2: c93.7,9.3 r5
  circle w0.2: c93.7,54.7 r5
  circle w0.2: c14.3,54.7 r5
  lines w0.2: 16.7,39.1 19.3,39.1 ; 18.7,38.5 19.3,39.1 ; 18.7,39.7 19.3,39.1 ; 94.9,38 97.5,38 ; 96.9,37.4 97.5,38 ; 96.9,38.6 97.5,38
  lines w0.6: 16.3,36.8 19.1,36.8 ; 16.4,42.3 19.2,42.3 ; 17.8,40.9 17.8,43.7 ; 93,35.8 95.8,35.8 ; 93,41.5 95.8,41.5 ; 94.4,40.1 94.4,42.9
  text "I.B." at 60.454,41.154 h1.2
  text "IN" at 13.354,38.354 h1.52
  text "OUT" at 89.854,37.254 h1.52
Mechanical 1:
  the board outline again, w0.2